# Altium PCB ongeki2.0_2021-08-10.pcbdoc
Units mil, origin at the board's own origin, x right, y up, seen from the top; angles counter-clockwise.
Board outline 4159.61 x 3372.2 mil, 2 copper layers (Top Layer, Bottom Layer); 1 components, 2 nets, 83 pads, 0 vias.
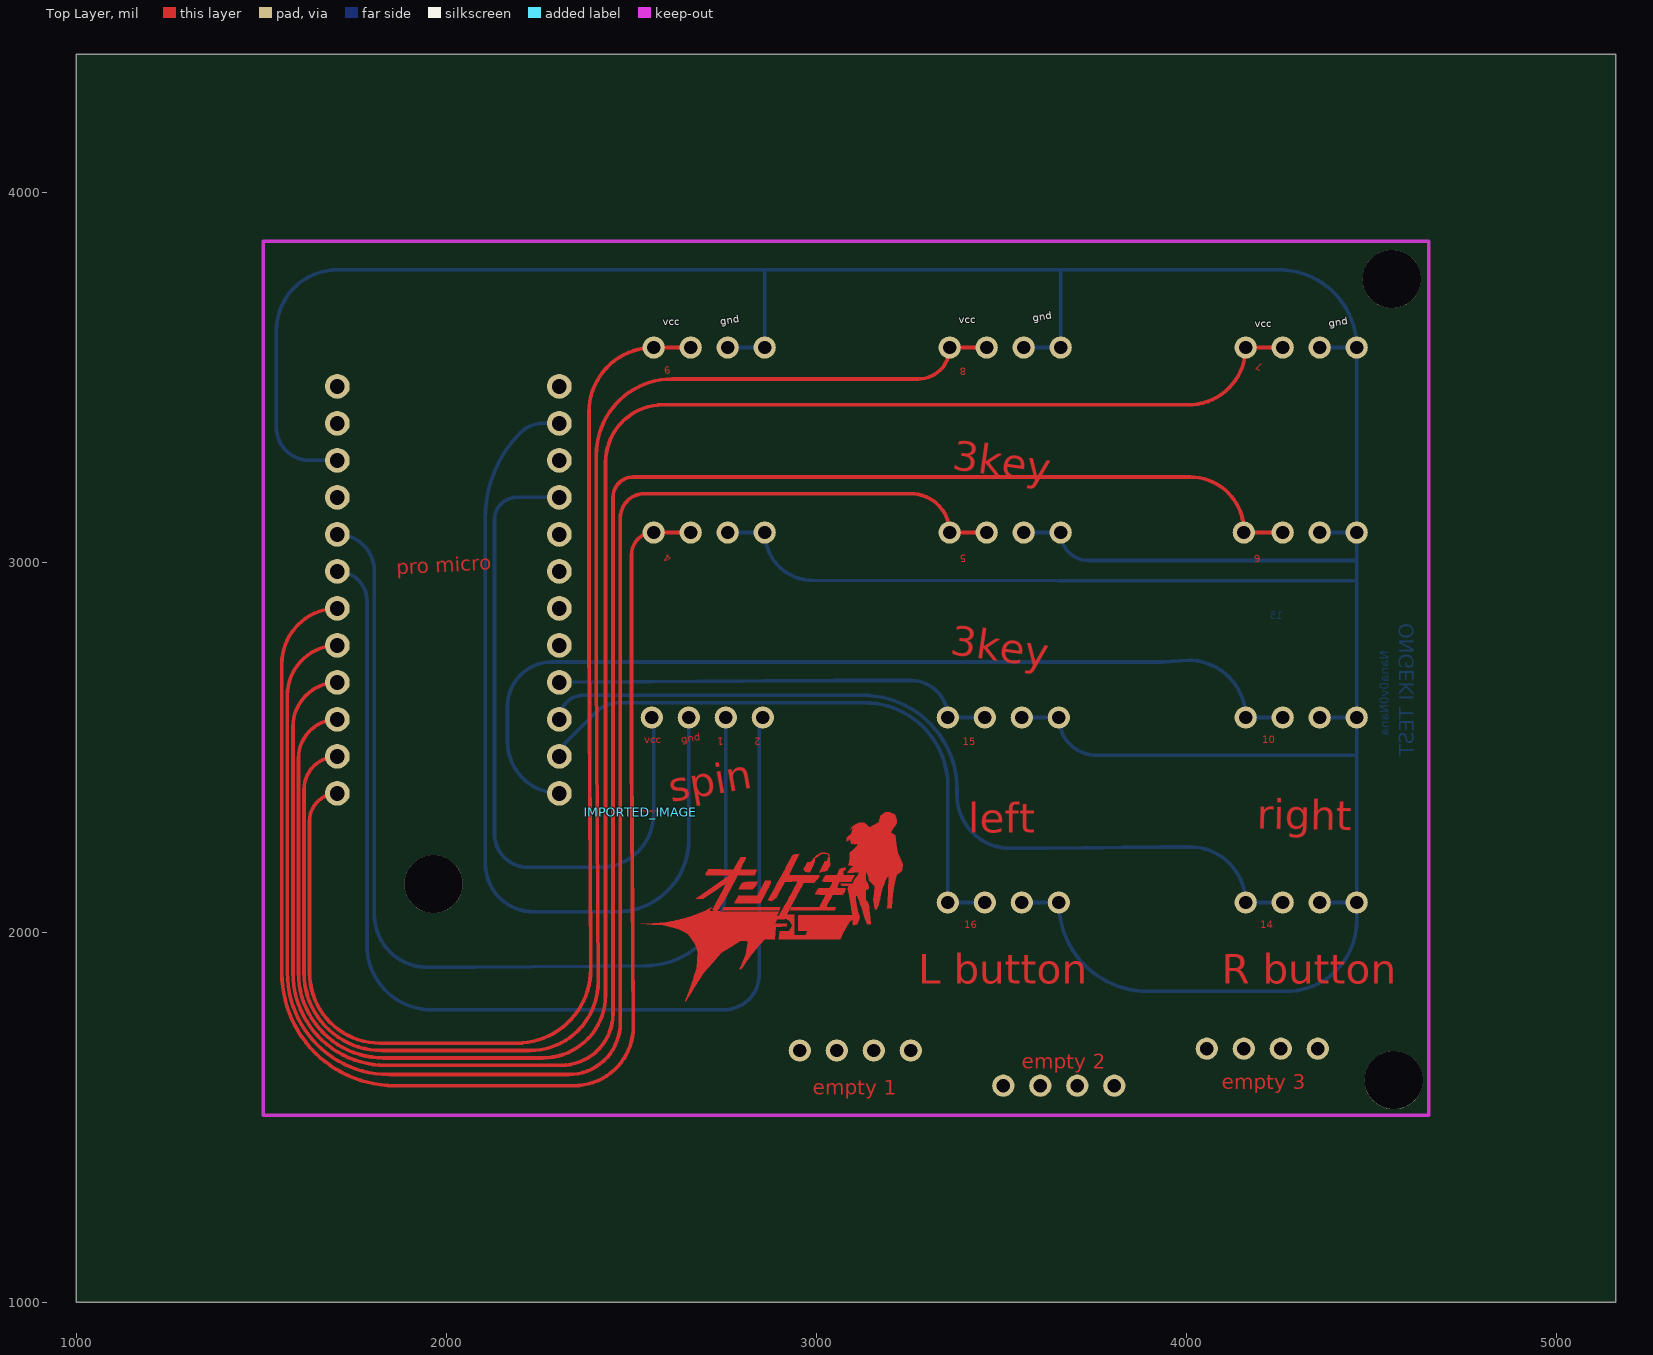
[diagram p0: Top Layer view]
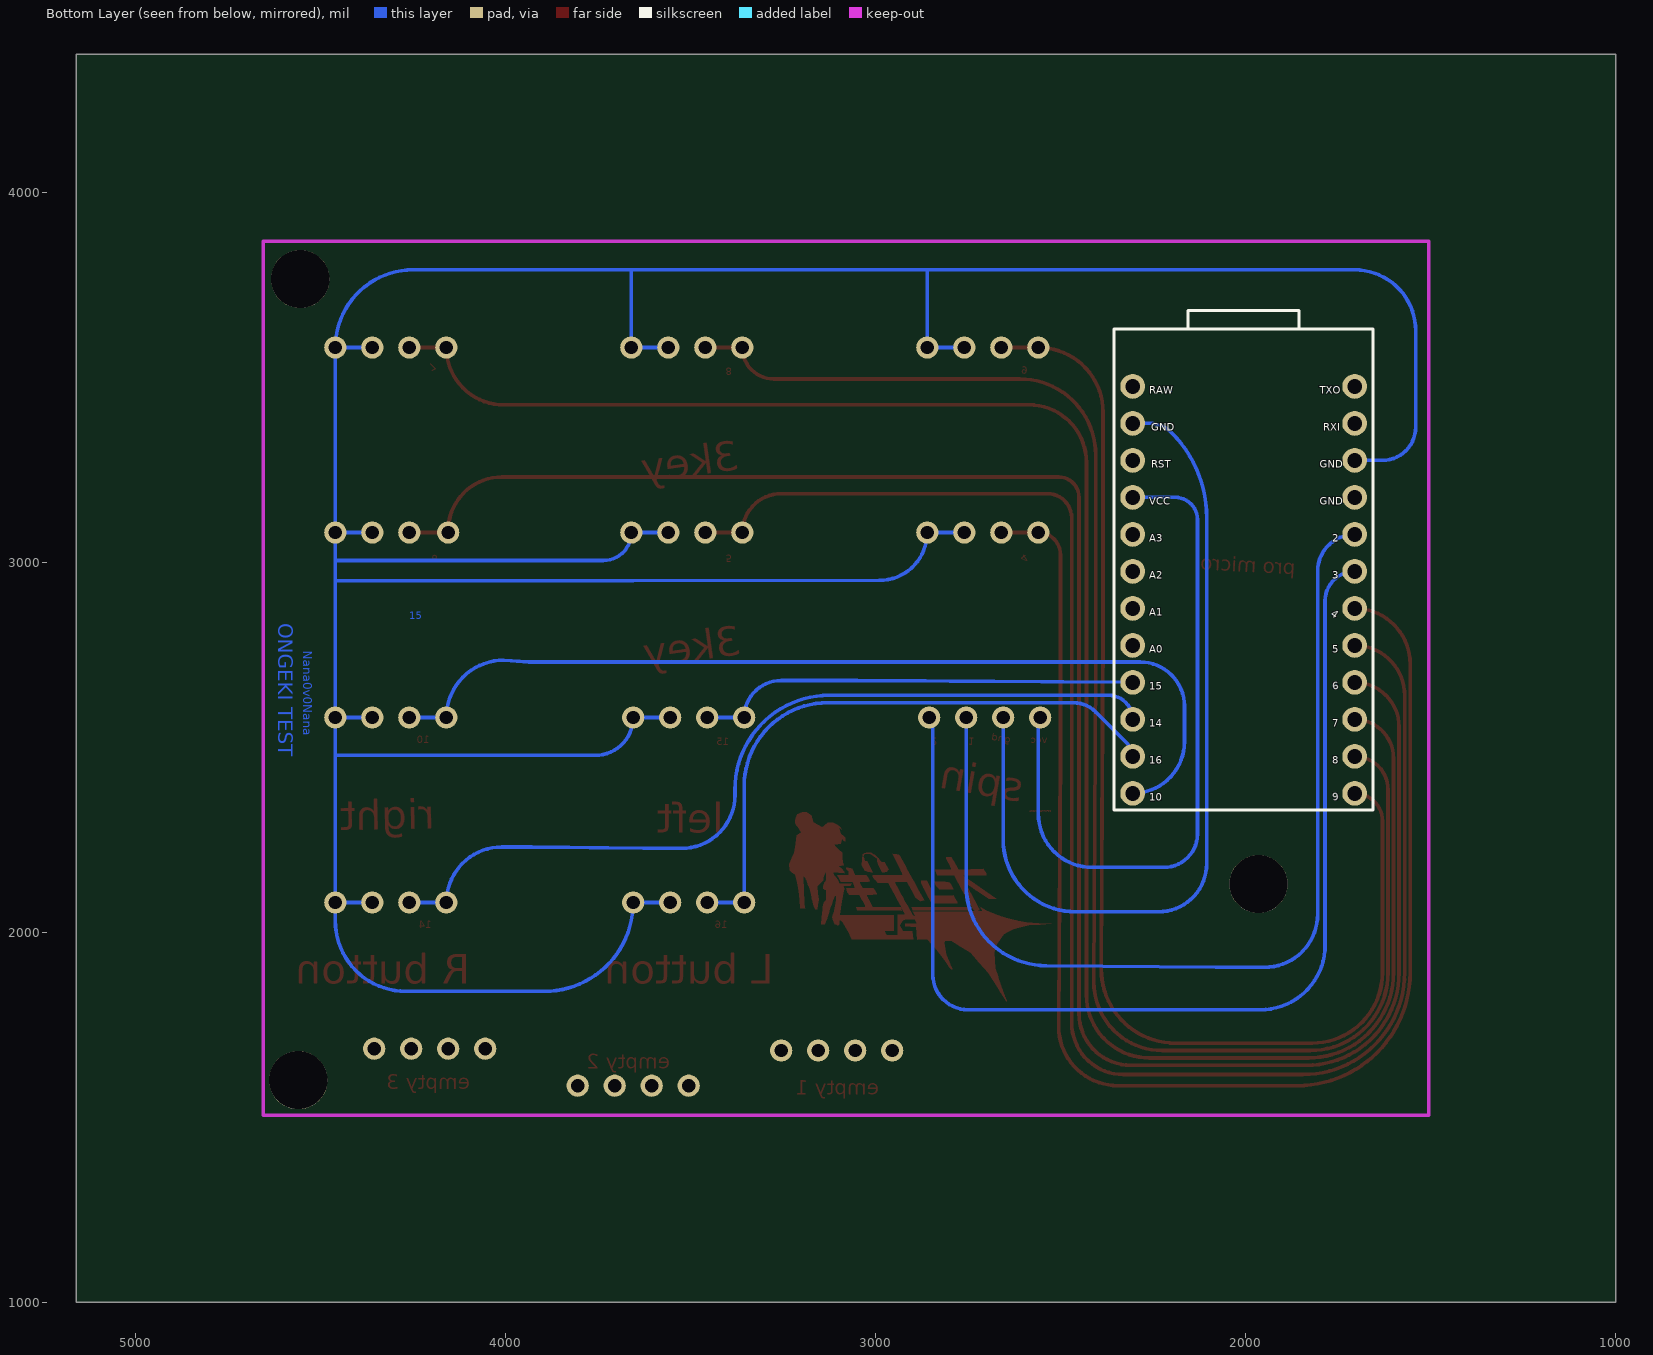
[diagram p1: Bottom Layer view, seen from below]

## Layer stack, top to bottom
Top Layer: signal copper (thickness not stored)
Dielectric: dielectric 12.6, FR-4, Dk 4.8
Bottom Layer: signal copper (thickness not stored)

## Board outline
5159.61,1000 1000,1000 1000,4372.2 5159.61,4372.2

## Components (designator, comment, footprint, x,y, rotation, side; value= is the part's Value field where it differs from the comment)
IMPORTED_IMAGE "IMPORTED_IMAGE" IMPORTED_IMAGE 2524.6,2324.54 r0 top

## Footprints (in the part's own frame and the unit in brackets; to place one, negate y for a bottom-side part, rotate by r counter-clockwise, add the part's x,y. Pads: shape width x height; smd on the part's side, far side on the other; paste and mask are expansions set on the pad)
IMPORTED_IMAGE [mil]
  Top Layer region: 1244 vertices and 7 holes, not listed, extent 0,-511.81 708.66,0
  Top Layer region: 247.6,-334.81 243.29,-341.31 224.39,-341.31 220.59,-341.28 217.05,-341.18 213.84,-341.03 211.04,-340.83 208.73,-340.58 206.98,-340.3 205.88,-339.98 205.49,-339.65 205.54,-339.41 205.69,-338.99 205.94,-338.4 206.28,-337.65 206.7,-336.75 207.19,-335.71 207.77,-334.54 208.41,-333.24 209.12,-331.83 209.89,-330.32 210.71,-328.71 211.58,-327.02 212.5,-325.26 213.46,-323.42 214.45,-321.53 215.47,-319.6 216.51,-317.63 217.58,-315.62 218.66,-313.6 219.75,-311.58 220.84,-309.55 221.93,-307.53 223.02,-305.53 224.1,-303.56 225.16,-301.63 226.2,-299.74 227.22,-297.92 228.2,-296.16 229.15,-294.47 230.06,-292.87 230.93,-291.37 231.74,-289.97 235.56,-283.46 254.55,-283.46 258.36,-283.49 261.92,-283.56 265.15,-283.67 267.96,-283.82 270.28,-284 272.04,-284.2 273.15,-284.43 273.54,-284.67 273.53,-284.82 273.46,-285.24 273.34,-285.8 273.16,-286.49 272.93,-287.28 272.67,-288.14 272.38,-289.05 272.05,-289.99 271.88,-290.46 270.23,-295.03 241.46,-295.03 239.89,-299.37 238.32,-303.71 262.53,-303.71 259.49,-310.8 256.45,-317.9 242.75,-318.76 229.06,-319.62 226.92,-326.52 239.41,-327.41 251.91,-328.3
  Top Layer region: 330.69,-338.42 330.69,-341.31 322.53,-341.31 322.53,-335.53 330.69,-335.53
  Top Layer region: 189.16,-341.31 189.16,-335.53 197.33,-335.53 197.33,-341.31
  Top Layer region: 258.57,-341.31 257.81,-341.28 257.13,-341.16 256.53,-340.98 255.99,-340.73 255.54,-340.42 255.17,-340.06 254.88,-339.65 254.67,-339.2 254.55,-338.71 254.51,-338.19 254.56,-337.63 254.71,-337.06 254.94,-336.47 255.27,-335.87 255.7,-335.26 256.22,-334.64 257.97,-332.79 260.31,-334.33 260.78,-334.7 261.22,-335.14 261.61,-335.66 261.96,-336.22 262.25,-336.81 262.46,-337.41 262.6,-338.01 262.65,-338.59 262.65,-341.31
  Top Layer region: 179 vertices and 0 holes, not listed, extent 404.31,-266.22 578.68,-150.41
  Top Layer region: 221.82,-266.2 221.82,-263.74 221.86,-263.21 221.97,-262.64 222.13,-262.04 222.36,-261.44 222.62,-260.86 222.93,-260.3 223.27,-259.8 223.64,-259.36 225.45,-257.43 377.42,-257.43 375.15,-264.66 298.49,-265.43
  Top Layer region: 212.06,-261.05 207.26,-266.11 200.93,-266.11 198.48,-265.96 196.46,-265.56 195.11,-264.97 194.61,-264.24 194.73,-263.78 195.08,-262.9 195.68,-261.59 196.5,-259.87 197.55,-257.73 198.83,-255.19 200.34,-252.25 202.06,-248.91 204,-245.18 206.16,-241.07 208.53,-236.58 211.11,-231.72 213.9,-226.48 216.89,-220.89 220.08,-214.93 223.47,-208.63 227.06,-201.97 230.84,-194.98 231.95,-192.92 231.98,-192.83 231.92,-192.8 231.78,-192.82 231.56,-192.9 231.27,-193.03 230.9,-193.22 230.46,-193.45 229.94,-193.74 229.05,-194.26 228,-194.89 226.82,-195.62 225.5,-196.45 224.05,-197.37 222.48,-198.38 220.8,-199.47 219,-200.65 217.11,-201.9 215.12,-203.22 213.04,-204.61 211.61,-205.58 210.14,-206.57 208.64,-207.58 207.11,-208.62 205.55,-209.69 203.97,-210.77 202.36,-211.88 201.55,-212.44 169.88,-234.29 159.79,-234.25 149.7,-234.21 193.9,-203.15 238.1,-172.1 206.83,-171.29 175.55,-170.47 175.55,-168.32 175.58,-168.06 175.64,-167.74 175.76,-167.37 175.91,-166.94 176.1,-166.47 176.32,-165.95 176.58,-165.39 176.87,-164.79 177.19,-164.17 177.53,-163.52 177.9,-162.85 178.3,-162.17 178.71,-161.47 179.14,-160.77 179.58,-160.06 180.04,-159.36 184.52,-152.55 218.27,-153.93 252.01,-155.32 255.04,-149.25 255.38,-148.57 255.78,-147.81 256.23,-146.96 256.72,-146.04 257.25,-145.05 257.83,-144 258.43,-142.91 259.06,-141.77 259.71,-140.61 260.38,-139.42 261.06,-138.23 261.75,-137.02 262.44,-135.82 263.12,-134.63 263.81,-133.47 264.47,-132.33 270.88,-121.48 284.42,-121.48 284.39,-123.65 284.35,-123.94 284.25,-124.35 284.08,-124.87 283.84,-125.49 283.56,-126.21 283.21,-127.02 282.82,-127.92 282.38,-128.88 281.9,-129.92 281.37,-131.01 280.81,-132.16 280.22,-133.35 279.6,-134.58 278.95,-135.84 278.28,-137.12 277.59,-138.41 276.23,-140.99 274.96,-143.5 273.81,-145.88 272.8,-148.06 271.98,-149.99 271.35,-151.59 270.95,-152.82 270.82,-153.6 270.82,-156.19 314.25,-156.19 311.15,-163.43 308.05,-170.66 263.03,-170.66 239.94,-213.32 237.57,-217.69 235.21,-222 232.88,-226.2 230.6,-230.29 228.38,-234.23 226.24,-238 224.18,-241.58 222.23,-244.94 220.4,-248.06 218.7,-250.91 217.14,-253.47 215.75,-255.72 214.53,-257.62 213.5,-259.16 212.67,-260.31
  Top Layer region: 254.48,-245.86 254.48,-244.14 254.51,-243.92 254.6,-243.62 254.74,-243.24 254.94,-242.79 255.18,-242.28 255.47,-241.71 255.8,-241.08 256.17,-240.41 256.58,-239.69 257.02,-238.93 257.49,-238.13 258,-237.31 258.52,-236.47 259.07,-235.61 259.64,-234.73 260.22,-233.85 265.97,-225.28 290.66,-225.86 315.36,-226.43 326.43,-205.81 337.5,-185.18 344.98,-185.15 352.47,-185.12 352.47,-188.5 352.45,-188.71 352.39,-188.98 352.3,-189.32 352.18,-189.73 352.02,-190.19 351.82,-190.72 351.6,-191.3 351.34,-191.94 351.05,-192.63 350.74,-193.38 350.39,-194.17 350.02,-195.01 349.41,-196.36 348.74,-197.8 348.02,-199.33 347.25,-200.95 346.44,-202.64 345.87,-203.81 345.28,-205.01 344.67,-206.24 344.04,-207.49 343.4,-208.76 342.75,-210.06 342.08,-211.37 341.39,-212.71 340.7,-214.05 339.99,-215.42 339.27,-216.79 338.55,-218.17 338.18,-218.87 323.89,-245.86 289.19,-245.86
  Top Layer region: 307.38,-203.7 303.09,-208.26 265.06,-208.26 269.83,-199.69 274.6,-191.11 278.83,-189.9 279.07,-189.83 279.35,-189.77 279.67,-189.71 280.03,-189.65 280.43,-189.58 280.86,-189.52 281.32,-189.46 281.82,-189.4 282.35,-189.34 282.92,-189.28 283.51,-189.22 284.12,-189.16 284.77,-189.1 285.44,-189.05 286.13,-188.99 286.84,-188.94 287.58,-188.89 288.34,-188.84 289.11,-188.79 289.9,-188.74 290.7,-188.7 291.52,-188.65 292.35,-188.61 293.19,-188.57 294.05,-188.54 294.91,-188.5 295.77,-188.47 296.65,-188.44 297.53,-188.41 298.41,-188.39 299.29,-188.37 300.17,-188.35 317.28,-188.01 314.48,-193.57 314.17,-194.16 313.83,-194.78 313.45,-195.43 313.05,-196.09 312.63,-196.77 312.18,-197.46 311.72,-198.15 311.24,-198.84 310.75,-199.52 310.26,-200.2 309.76,-200.85 309.27,-201.48 308.78,-202.09 308.3,-202.67 307.83,-203.2
  Top Layer region: 482.8,-161.98 490.44,-147.52 498.08,-133.06 501.43,-133.06 504.78,-133.05 506.45,-125.99 508.12,-118.92 506.34,-115.86 504.57,-112.81 489.36,-112.81 470.86,-126.05 470.58,-131.86 470.56,-132.17 470.52,-132.51 470.46,-132.88 470.39,-133.27 470.31,-133.69 470.2,-134.13 470.09,-134.59 469.96,-135.07 469.81,-135.57 469.66,-136.09 469.49,-136.63 469.31,-137.18 469.11,-137.75 468.91,-138.33 468.69,-138.92 468.47,-139.53 468.23,-140.14 467.98,-140.77 467.73,-141.4 467.47,-142.04 467.19,-142.68 466.91,-143.33 466.63,-143.98 466.33,-144.63 466.03,-145.29 465.72,-145.94 465.41,-146.6 465.09,-147.25 464.77,-147.89 464.44,-148.54 464.11,-149.17 463.78,-149.8 457.26,-161.93 451.68,-161.96 450.49,-161.9 449.27,-161.71 448.05,-161.42 446.85,-161.04 445.72,-160.56 444.7,-160.02 443.81,-159.43 443.09,-158.79 440.08,-155.59 445.54,-145.77 450.99,-135.95 458.65,-135.95 464.76,-128.33 465.08,-127.93 465.42,-127.52 465.78,-127.11 466.15,-126.69 466.54,-126.26 466.94,-125.82 467.35,-125.38 467.77,-124.94 468.21,-124.5 468.65,-124.05 469.1,-123.6 469.57,-123.15 470.03,-122.7 470.51,-122.25 470.99,-121.81 471.47,-121.36 471.96,-120.92 472.44,-120.49 472.93,-120.06 473.43,-119.63 473.92,-119.21 474.41,-118.8 474.89,-118.4 475.38,-118.01 475.86,-117.63 476.33,-117.26 476.8,-116.9 477.26,-116.56 477.72,-116.23 478.17,-115.91 478.6,-115.61 479.03,-115.32 487.19,-109.94 495.36,-109.97 497.06,-110.02 498.77,-110.15 500.45,-110.35 502.03,-110.62 503.49,-110.94 504.77,-111.3 505.82,-111.7 506.61,-112.13 509.69,-114.25 512.42,-143.18 508.76,-150.76 505.1,-158.35 498.87,-160.13 498.21,-160.31 497.52,-160.48 496.8,-160.65 496.06,-160.82 495.31,-160.98 494.55,-161.12 493.79,-161.26 493.02,-161.39 492.27,-161.51 491.53,-161.61 490.81,-161.71 490.12,-161.79 489.46,-161.85 488.83,-161.9 488.25,-161.93 487.72,-161.94

## Free pads (board coordinates)
  round 66.93 hole 40: 1(1705,2375.2) 2(1705,2475.2) 3(1705,2575.2) 4(1705,2675.2) 5(1705,2775.2) 6(1705,2875.2) 7(1705,2975.2) 8(1705,3075.2) 9(1705,3175.2) 10(1705,3275.2) 11(1705,3375.2) 12(1705,3475.2) 13(2305,3475.2) 14(2305,3375.2) 15(2305,3275.2) 16(2305,3175.2) 17(2305,3075.2) 18(2305,2975.2) 19(2305,2875.2) 20(2305,2775.2) 21(2305,2675.2) 22(2305,2575.2) 23(2305,2475.2) 24(2305,2375.2)
  round 60 hole 36: 25(2560,3080.2) 25(2560,3580.2) 25(3355,2080.2) 25(3355,2580.2) 26(2660,3080.2) 26(2660,3580.2) 26(3455,2080.2) 26(3455,2580.2) 27(2760,3080.2) 27(2760,3580.2) 27(3555,2080.2) 27(3555,2580.2) 28(2860,3080.2) 28(2860,3580.2) 28(3655,2080.2) 28(3655,2580.2) 31(2555,2580.2) 31(2955,1680.2) 31(3360,3080.2) 31(3360,3580.2) 31(3505,1585.2) 31(4055,1685.2) 32(2655,2580.2) 32(3055,1680.2) 32(3460,3080.2) 32(3460,3580.2) 32(3605,1585.2) 32(4155,1685.2) 33(2755,2580.2) 33(3155,1680.2) 33(3560,3080.2) 33(3560,3580.2) 33(3705,1585.2) 33(4255,1685.2) 34(2855,2580.2) 34(3255,1680.2) 34(3660,3080.2) 34(3660,3580.2) 34(3805,1585.2) 34(4355,1685.2) 35(4155,3080.2) 35(4160,2080.2) 35(4160,2580.2) 35(4160,3580.2) 36(4260,2080.2) 36(4260,2580.2) 36(4260,3080.2) 36(4260,3580.2) 37(4360,2080.2) 37(4360,2580.2) 37(4360,3080.2) 37(4360,3580.2) 38(4460,2080.2) 38(4460,2580.2) 38(4460,3080.2) 38(4460,3580.2)
  round 157.48 hole 157.48 unplated: ""(1965,2130.2) ""(4555,3765.2) ""(4560,1600.2)

## Nets (pads, with @x,y where several pads share a name; then routed paths per layer and width w, separated by ;. In a path a pad name is that pad's centre, name@x,y a point inside that pad or via, vN(x,y) a via of type N, cw(c..) or ccw(c..) an arc to the next point about the centre after c; other vN are vias at no path point)
S$1294: pad.1 pad.2 pad.3 pad.4 pad.5 pad.6 pad.7 pad.8 pad.10 pad.14 pad.16 pad.21 pad.22 pad.23 pad.24 pad.25 pad.26 pad.27 pad.28 pad.31 pad.32 pad.33 pad.34 pad.35 pad.36 pad.37 pad.38 | length 55343.9
  Top Layer w10: pad.8@1676.57,3075.2 pad.8 ; pad.1 ccw(c1705,2300.2) 1630,2300.2 1630,1890.2 ccw(c1820,1890.2) 1820,1700.2 2030,1700.2 2190,1700.2 ccw(c2190,1900.2) 2390,1900.2 2385,2830.2 2385,3405.2 cw(c2560,3405.2) 2560,3580.2 pad.26@2660,3580.2 ; pad.2 ccw(c1705,2385.2) 1615,2385.2 1615,1890.2 ccw(c1825,1890.2) 1825,1680.2 2030,1680.2 2225,1680.2 ccw(c2225,1865.2) 2410,1865.2 2405,2718.71 ; pad.3 ccw(c1705,2470.2) 1600,2470.2 1600,1890.2 ccw(c1830,1890.2) 1830,1660.2 2035,1660.2 2260,1660.2 ccw(c2260,1830.2) 2430,1830.2 2430,2595.2 2430,3270.2 cw(c2585,3270.2) 2585,3425.2 4005,3425.2 ccw(c4005,3580.2) 4160,3580.2 pad.36@4260,3580.2 ; pad.4 ccw(c1705,2555.2) 1585,2555.2 1585,1890.2 ccw(c1835,1890.2) 1835,1640.2 2035,1640.2 2310,1640.2 ccw(c2310,1780.2) 2450,1780.2 2450,2545.2 ; pad.5 ccw(c1705,2640.2) 1570,2640.2 1570,1890.2 ccw(c1845,1890.2) 1845,1615.2 2035,1615.2 2330,1615.2 ccw(c2330,1755.2) 2470,1755.2 2470,2525.2 2470,3120.2 cw(c2535,3120.2) 2535,3185.2 3255,3185.2 cw(c3255,3080.2) 3360,3080.2 pad.32@3460,3080.2 ; pad.6 ccw(c1705,2725.2) 1555,2725.2 1555,1890.2 ccw(c1860,1890.2) 1860,1585.2 2035,1585.2 2345,1585.2 ccw(c2345,1745.2) 2505,1745.2 2500,2492.7 ; 2405,2710.2 2405,3290.2 cw(c2610,3290.2) 2610,3495.2 3275,3495.2 ccw(c3275,3580.2) 3360,3580.2 pad.32@3460,3580.2 ; 2450,2547.7 2450,3172.7 ; 2450,3175.2 cw(c2505,3175.2) 2505,3230.2 4010,3230.2 cw(c4010,3085.2) 4155,3085.2 4155,3080.2 pad.36@4260,3080.2 ; 2500,2485.2 2500,3020.2 cw(c2560,3020.2) 2560,3080.2 pad.26@2660,3080.2
  Bottom Layer w10: pad.7 cw(c1705,2895.2) 1785,2895.2 1785,2636.47 1785,1950.2 ; pad.8 cw(c1705,2975.2) 1805,2975.2 1805,2838.9 1805,2040.2 ; pad.10 1630,3275.2 cw(c1630,3365.2) 1540,3365.2 1540,3625.2 cw(c1705,3625.2) 1705,3790.2 2860,3790.2 ; 1785,1964.81 ccw(c1959.62,1964.81) 1959.62,1790.2 1995.42,1790.2 ; 1805,2048.31 ccw(c1948.12,2048.31) 1948.12,1905.2 2080,1905.2 2538.53,1909.62 ccw(c2538.53,2126.09) 2755,2126.09 ; 1965,1790.2 2750,1790.2 ccw(c2750,1885.2) 2845,1885.2 2845,2570.2 cw(c2855,2570.2) pad.34@2855,2580.2 ; 2105,2185.02 ccw(c2234.82,2185.02) 2234.82,2055.2 2460,2055.2 ccw(c2460,2250.2) 2655,2250.2 pad.32@2655,2580.2 ; 2105,2185.2 2105,2566.97 2105,2775.2 2105,3120.85 cw(c2429.35,3120.85) 2200,3350.2 cw(c2260.36,3289.84) 2260.36,3375.2 pad.14 ; 2130,2335.2 2130,3030.34 2130,3115.2 cw(c2190,3115.2) 2190,3175.2 pad.16 pad.16@2311.05,3169.15 ; 2130,2341.02 2130,2265.2 ccw(c2220,2265.2) 2220,2175.2 2415,2175.2 ccw(c2415,2320.2) 2560,2320.2 2560,2568.13 ccw(c2542.93,2568.13) pad.31@2555,2580.2 ; 2165,2610.2 cw(c2285,2610.2) 2285,2730.2 3095,2730.2 ; 2165,2615.2 2165,2515.2 ccw(c2305,2515.2) pad.24 ; pad.23 cw(c2353.28,2475.2) 2319.14,2509.34 2400,2590.2 2405.25,2595.45 cw(c2465,2535.7) 2465,2620.2 3135,2620.2 ; pad.22 cw(c2370,2575.2) 2370,2640.2 2405,2640.2 3125,2640.2 cw(c3125,2385.2) 3380,2385.2 3380,2370.2 ccw(c3523.54,2370.2) 3523.54,2226.66 3627.65,2226.66 ; pad.21 3050,2680.2 3255,2680.2 cw(c3255,2580.2) 3355,2580.2 pad.26@3455,2580.2 ; 2755,2116.2 pad.33@2755,2580.2 ; pad.27@2760,3080.2 pad.28@2860,3080.2 ; pad.27@2760,3580.2 2860,3580.2 2860,3790.2 ; pad.28@2860.67,3079.52 ccw(c2989.33,3079.52) 2989.33,2950.87 3656.34,2950.2 ; 3097.5,2730.2 3302.5,2730.2 3937.5,2730.2 4005,2735.2 cw(c4005,2580.2) 4160,2580.2 pad.36@4260,2580.2 ; 3129.61,2620.2 cw(c3129.61,2394.81) 3355,2394.81 3355,2080.2 pad.26@3455,2080.2 ; pad.27@3540,2080.2 pad.28@3640,2080.2 ; pad.27@3550,2580.2 pad.28@3650,2580.2 ; pad.33@3560,3080.2 pad.34@3660,3080.2 ; pad.33@3560,3580.2 3660,3580.2 3660,3790.2 ; 3616.63,2226.53 3930,2230.2 4010,2230.2 cw(c4010,2080.2) 4160,2080.2 pad.36@4260,2080.2 ; pad.28@3655,2080.2 ccw(c3895,2080.2) 3895,1840.2 4270,1840.2 ccw(c4270,2030.2) 4460,2030.2 pad.38@4460,2080.2 ; pad.28@3655,2580.2 ccw(c3757.19,2580.2) 3757.19,2478.01 4460,2478.01 ; 3655,2950.2 4456.47,2950.2 ; pad.34@3655,3075.2 cw(c3660,3075.2) pad.34@3660,3080.2 ; 3735.87,3004.32 4460,3004.32 ; 3735.87,3004.33 cw(c3735.87,3080.2) pad.34@3660,3080.2 ; pad.37@4360,2080.2 pad.38@4460,2080.2 ; pad.37@4360,2580.2 pad.38@4460,2580.2 ; pad.37@4360,3080.2 pad.38@4460,3080.2 ; pad.37@4360,3580.2 pad.38@4460,3580.2 ; pad.38@4455,2075.2 cw(c4460,2075.2) pad.38@4460,2080.2 ; 2860,3790.2 3660,3790.2 ; 3660,3790.2 4250,3790.2 cw(c4250,3580.2) pad.38@4460,3580.2 ; pad.38@4460,2080.2 pad.38@4460,2580.2 ; pad.38@4460,2580.2 pad.38@4460,3080.2 ; pad.38@4460,3080.2 pad.38@4460,3580.2
S$2363: pad.9

## Other copper
Top Layer:
  text "7" at 4209.16,3534.12 h19.68 r155
  text "9" at 2604.14,3530 h19.68 r185
  text "8" at 3405,3525.04 h19.68 r180
  text "3key" at 3364.43,3250.59 h80 r352
  text "5" at 3405,3020.04 h19.68 r180
  text "6" at 4199.14,3020 h19.68 r185
  text "4" at 2610.65,3013.26 h19.68 r145
  text "pro micro" at 1866.03,2965.54 h39.37 r3
  text "3key" at 3359.43,2750.59 h80 r352
  text "1" at 2750,2525.04 h19.68 r180
  text "2" at 2850,2525.04 h19.68 r180
  text "vcc" at 2535,2510.35 h19.68
  text "gnd" at 2636.54,2510.48 h19.68 r9
  text "10" at 4205,2510.35 h19.68
  text "15" at 3395,2505.35 h19.68
  text "spin" at 2606.95,2350.8 h80 r10
  text "right" at 4189.3,2280.2 h80 r359
  text "left" at 3410,2269.3 h80
  text "16" at 3400,2010.35 h19.68
  text "14" at 4200,2010.35 h19.68
  text "L button" at 3275,1860.2 h80
  text "R button" at 4095,1860.2 h80
  text "empty 2" at 3555,1630.51 h39.37
  text "empty 3" at 4095,1575.51 h39.37
  text "empty 1" at 2990,1560.51 h39.37
Bottom Layer:
  text "15" at 4260,2845.35 h19.68
  text "ONGEKI TEST" at 4614.69,2835.2 h39.37 r90
  text "Nana0v0Nana" at 4546.81,2760.2 h23.62 r90

## Silkscreen, mask and mechanical layers (free items; w line width, h text height)
Top Overlay:
  text "gnd" at 3586.54,3650.48 h19.68 r9
  text "vcc" at 3385,3645.35 h19.68
  text "vcc" at 2585,3640.35 h19.68
  text "gnd" at 2741.54,3640.48 h19.68 r9
  text "vcc" at 4185,3635.35 h19.68
  text "gnd" at 4386.54,3635.48 h19.68 r9
Bottom Overlay:
  lines w8: 1655,2330.2 2355,2330.2 ; 1655,2330.2 1655,3630.2 ; 1655,2330.2 2355,2330.2 ; 1655,2330.2 1655,3630.2 ; 1655,3630.2 2355,3630.2 ; 1655,3630.2 2355,3630.2 ; 1855,3680.2 2155,3680.2 ; 1855,3680.2 2155,3680.2 ; 1855,3680.2 1855,3630.2 1855,3680.2 ; 2155,3680.2 2155,3630.2 2155,3680.2 ; 2355,2330.2 2355,3630.2 ; 2355,2330.2 2355,3630.2
  text "TXO" at 1800,3455.35 h19.68
  text "RAW" at 2260,3455.35 h19.68
  text "RXI" at 1790,3355.35 h19.68
  text "GND" at 2255,3355.35 h19.68
  text "GND" at 1800,3255.35 h19.68
  text "RST" at 2255,3255.35 h19.68
  text "GND" at 1800,3155.35 h19.68
  text "VCC" at 2260,3155.35 h19.68
  text "2" at 1765,3055.35 h19.68
  text "A3" at 2260,3055.35 h19.68
  text "3" at 1765,2955.35 h19.68
  text "A2" at 2260,2955.35 h19.68
  text "4" at 1770.65,2857.13 h19.68 r35
  text "A1" at 2260,2855.35 h19.68
  text "5" at 1765,2755.35 h19.68
  text "A0" at 2260,2755.35 h19.68
  text "6" at 1764.14,2655.39 h19.68 r355
  text "15" at 2260,2655.35 h19.68
  text "7" at 1765,2555.35 h19.68
  text "14" at 2260,2555.35 h19.68
  text "8" at 1765,2455.35 h19.68
  text "16" at 2260,2455.35 h19.68
  text "9" at 1764.14,2355.39 h19.68 r355
  text "10" at 2260,2355.35 h19.68
Document:
  lines w0.1: 3078.8,2685.1 3080.8,2687.1